# EAGLE board TFT_adapter_BB (EAGLE 7.7.0)
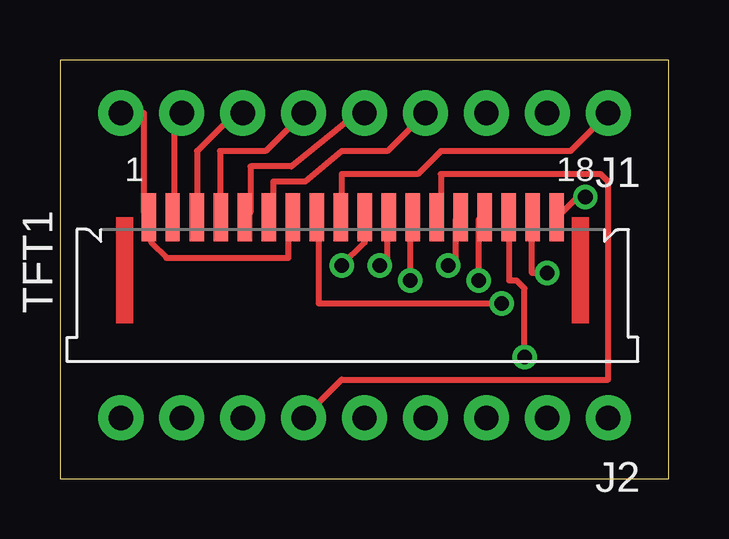
[diagram p0: board, top side]
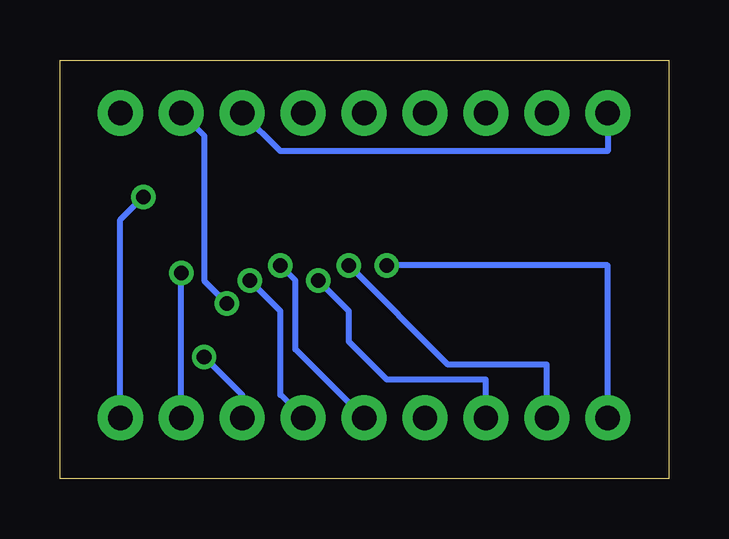
[diagram p1: board, bottom side, seen from below]

Size 25.38 x 17.45 mm. Coordinates in mm from the lower left corner, seen from the top.
Outline: 0,0 25.38,0 25.38,17.45 0,17.45 0,0
Copper layers (1*16): Top 0.035mm / dielectric 1.5mm / Bottom 0.035mm
Design rules "default *": minimum track width 10mil, minimum drill 24mil, track to track 12mil, track to pad 12mil, pad to pad 12mil, via to via 12mil, smd to smd 12mil, copper to edge 40mil, drill to drill 8mil, minimum pad ring 10mil, minimum via ring 8mil, stop-mask expansion 4mil, vias tented up to drill 0mil, thermal gap 10mil

## Footprints (pad centres in the part's own frame; a part is rotated, then mirrored left to right if it is on the bottom)
1X09_NO_SILK = drill 1.016 pad 1.88: 1 0,0; 2 2.54,0; 3 5.08,0; 4 7.62,0; 5 10.16,0; 6 12.7,0; 7 15.24,0; 8 17.78,0; 9 20.32,0
TFT-CONN-18 = smd 0.6 x 2: 1 -9,2; 2 -8,2; 3 -7,2; 4 -6,2; 5 -5,2; 6 -4,2; 7 -3,2; 8 -2,2; 9 -1,2; 10 0,2; 11 1,2; 12 2,2; 13 3,2; 14 4,2; 15 5,2; 16 6,2; 17 7,2; 18 8,2

## Placement (x,y rotation side)
J1  [1X09_NO_SILK]  22.86,15.24 180 top
J2  [1X09_NO_SILK]  22.86,2.54 180 top
TFT1  TFT-18-1.0MM  [TFT-CONN-18]  12.7,8.89 0 top

## Library data of the parts
J1 J2 = SparkFun-Connectors
TFT1 = custom

## Nets
GND: J1.3 J1.9 TFT1.1 TFT1.7
GND2: J1.2 TFT1.8
LEDA: J2.9 TFT1.10
N$2: J1.8 TFT1.2
N$3: J1.7 TFT1.3
N$4: J1.6 TFT1.4
N$5: J1.5 TFT1.5
N$6: J1.4 TFT1.6
N$10: J2.1 TFT1.18
N$11: J2.2 TFT1.17
N$12: J2.3 TFT1.16
N$13: J2.4 TFT1.15
N$14: J2.5 TFT1.14
N$15: J2.7 TFT1.12
N$16: J2.6 TFT1.13
N$17: J2.8 TFT1.11
VDD: J1.1 TFT1.9

## Tracks (layer width: path | path; a pad name or v marks a point on that pad's centre or on a via)
GND
  Top 0.254: J1.9 3.49,15.24 3.49,11.11 TFT1.1 3.81,10.79 3.81,9.84 4.45,9.21 9.53,9.21 9.53,10.79 TFT1.7
  Bottom 0.254: J1.3 16.19,13.65 2.54,13.65 J1.9
GND2  (via drill 0.61)
  Top 0.254: v18.41,7.3 10.79,7.3 10.79,10.79 TFT1.8
  Bottom 0.254: v18.41,7.3 19.37,8.26 19.37,14.29 J1.2
LEDA  (via drill 0.61)
  Top 0.254: TFT1.10 12.7,9.84 v11.75,8.89
  Bottom 0.254: v11.75,8.89 2.54,8.89 J2.9
N$2
  Top 0.254: J1.8 4.76,15.24 4.76,11.11 TFT1.2
N$3
  Top 0.254: J1.7 7.3,15.24 5.71,13.65 5.71,11.11 TFT1.3
N$4
  Top 0.254: J1.6 8.57,13.65 6.67,13.65 6.67,11.11 TFT1.4
N$5
  Top 0.254: J1.5 12.38,15.24 9.65,13.02 7.94,13.02 7.94,11.11 TFT1.5
N$6
  Top 0.254: J1.4 13.65,13.65 11.75,13.65 10.22,12.38 8.89,12.38 8.89,11.11 TFT1.6
N$10  (via drill 0.61)
  Top 0.254: v21.91,11.75 21.59,11.75 20.95,11.11 TFT1.18
  Bottom 0.254: v21.91,11.75 22.86,10.79 J2.1
N$11  (via drill 0.61)
  Top 0.254: v20.32,8.57 19.68,8.57 19.68,10.79 TFT1.17
  Bottom 0.254: J2.2 v20.32,8.57
N$12  (via drill 0.61)
  Top 0.254: v19.37,5.08 19.37,7.94 19.05,8.26 18.73,8.26 18.73,10.79 TFT1.16
  Bottom 0.254: v19.37,5.08 17.78,3.49 J2.3
N$13  (via drill 0.61)
  Top 0.254: v17.46,8.26 17.46,10.79 TFT1.15
  Bottom 0.254: v17.46,8.26 16.19,6.99 16.19,3.49 J2.4
N$14  (via drill 0.61)
  Top 0.254: v16.19,8.89 16.51,8.89 16.51,10.79 TFT1.14
  Bottom 0.254: v16.19,8.89 15.56,8.26 15.56,5.4 J2.5
N$15  (via drill 0.61)
  Top 0.254: v14.61,8.26 14.61,10.79 TFT1.12
  Bottom 0.254: v14.61,8.26 13.34,6.99 13.34,5.71 11.75,4.13 7.62,4.13 J2.7
N$16
  Top 0.254: J2.6 11.75,4.13 22.86,4.13 22.86,12.38 22.54,12.7 15.88,12.7 15.88,11.11 TFT1.13
N$17  (via drill 0.61)
  Top 0.254: v13.34,8.89 13.65,8.89 13.65,10.79 TFT1.11
  Bottom 0.254: v13.34,8.89 9.21,4.76 5.08,4.76 J2.8
VDD
  Top 0.254: J1.1 21.27,13.65 15.88,13.65 14.92,12.7 11.75,12.7 11.75,11.11 TFT1.9